# Altium PCB 24VRegulatorKhaled.PcbDoc
Units mil, origin at the board's own origin, x right, y up, seen from the top; angles counter-clockwise.
Board outline 3030 x 3065 mil, 2 copper layers (Top Layer, Bottom Layer); 12 components, 7 nets, 45 pads, 5 vias.
Unrouted connection lines stored in the file: 5.
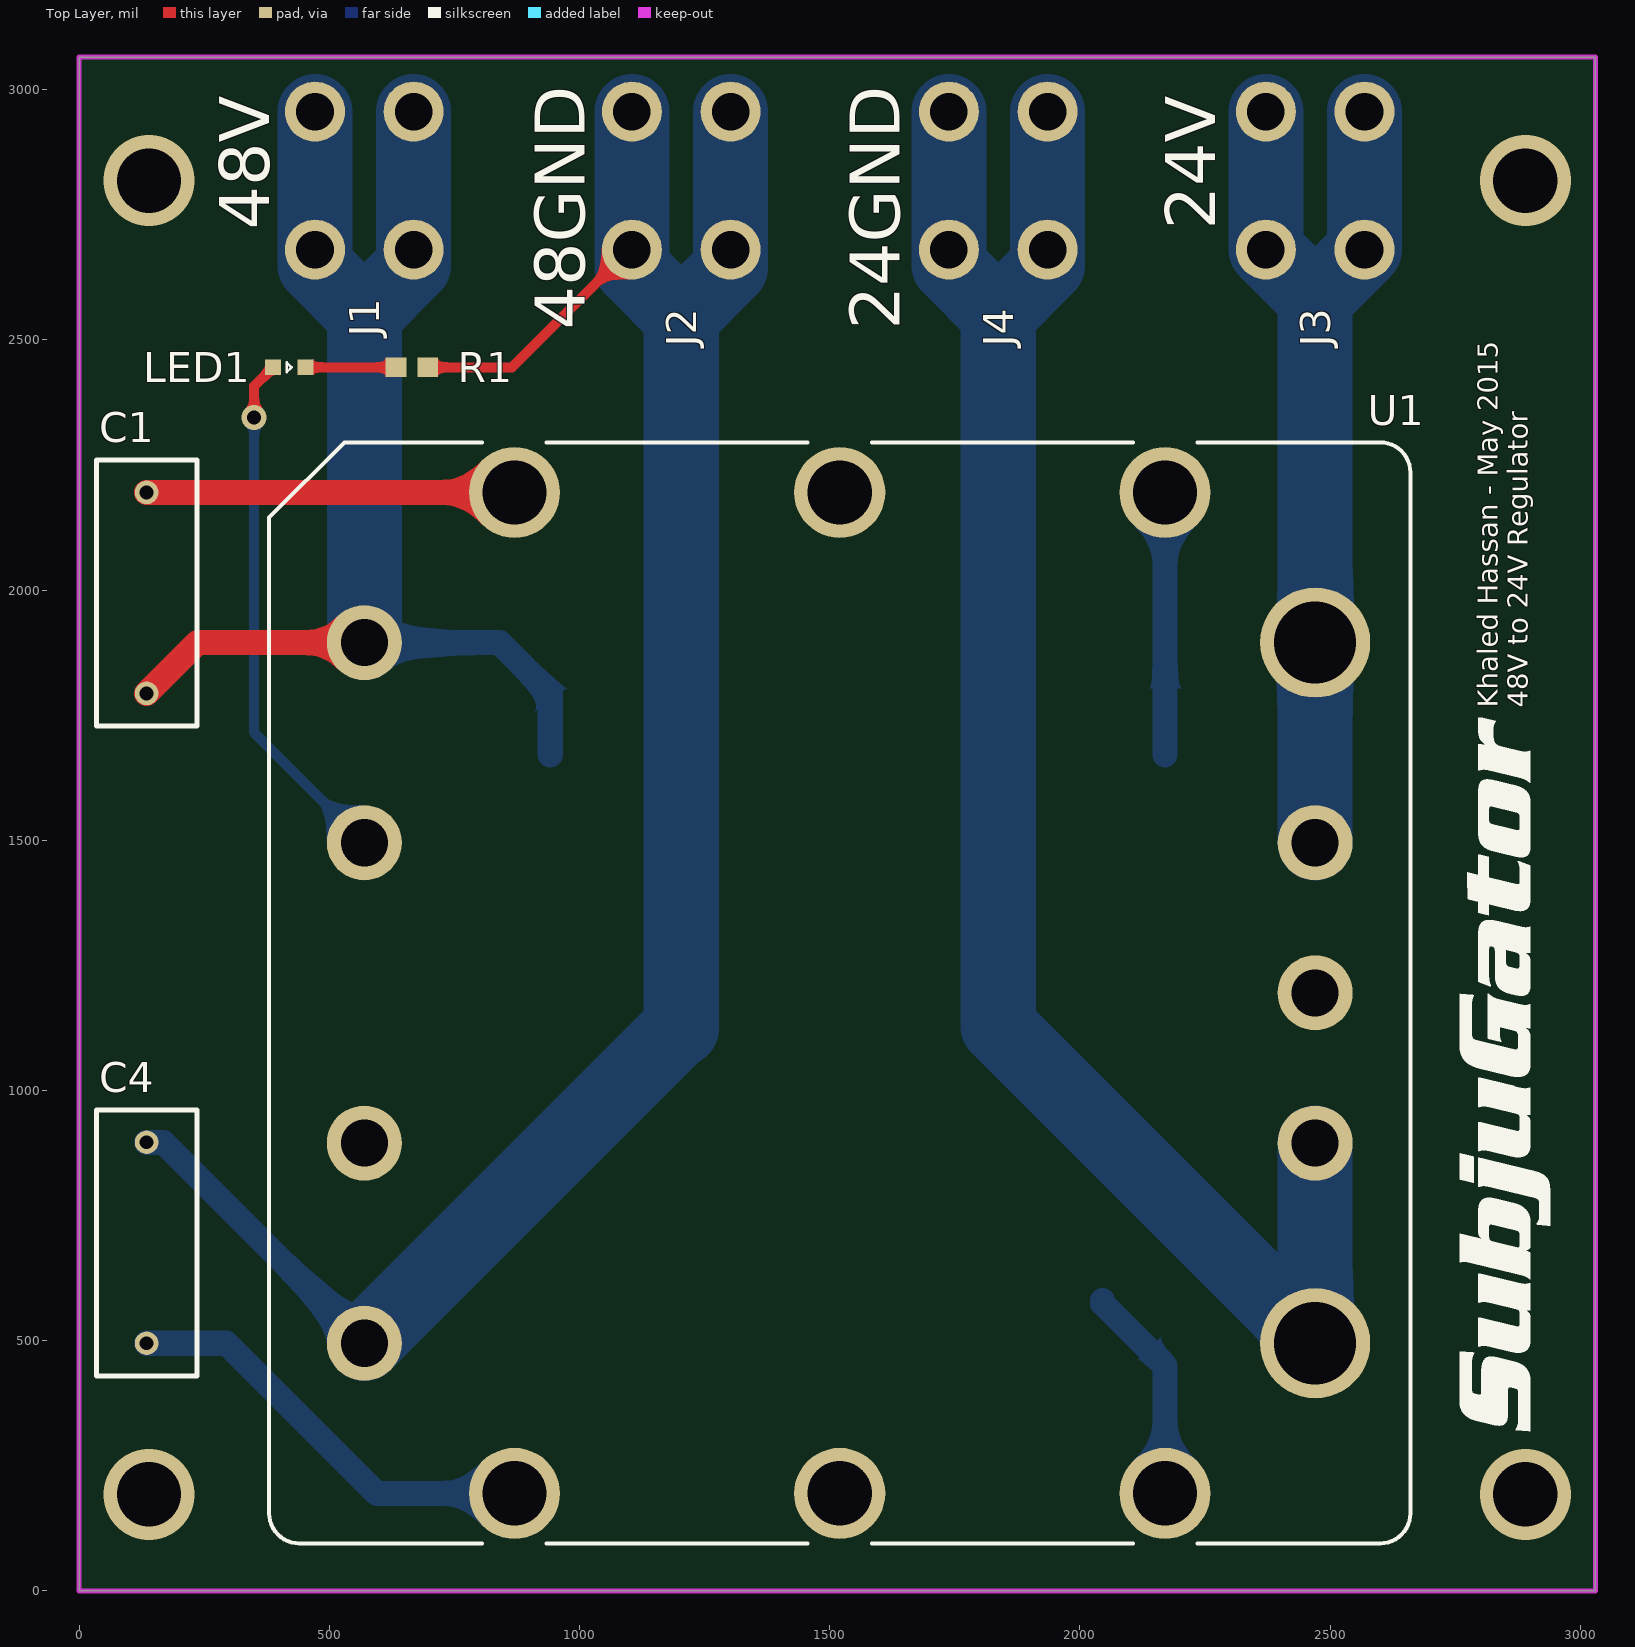
[diagram p0: Top Layer view]
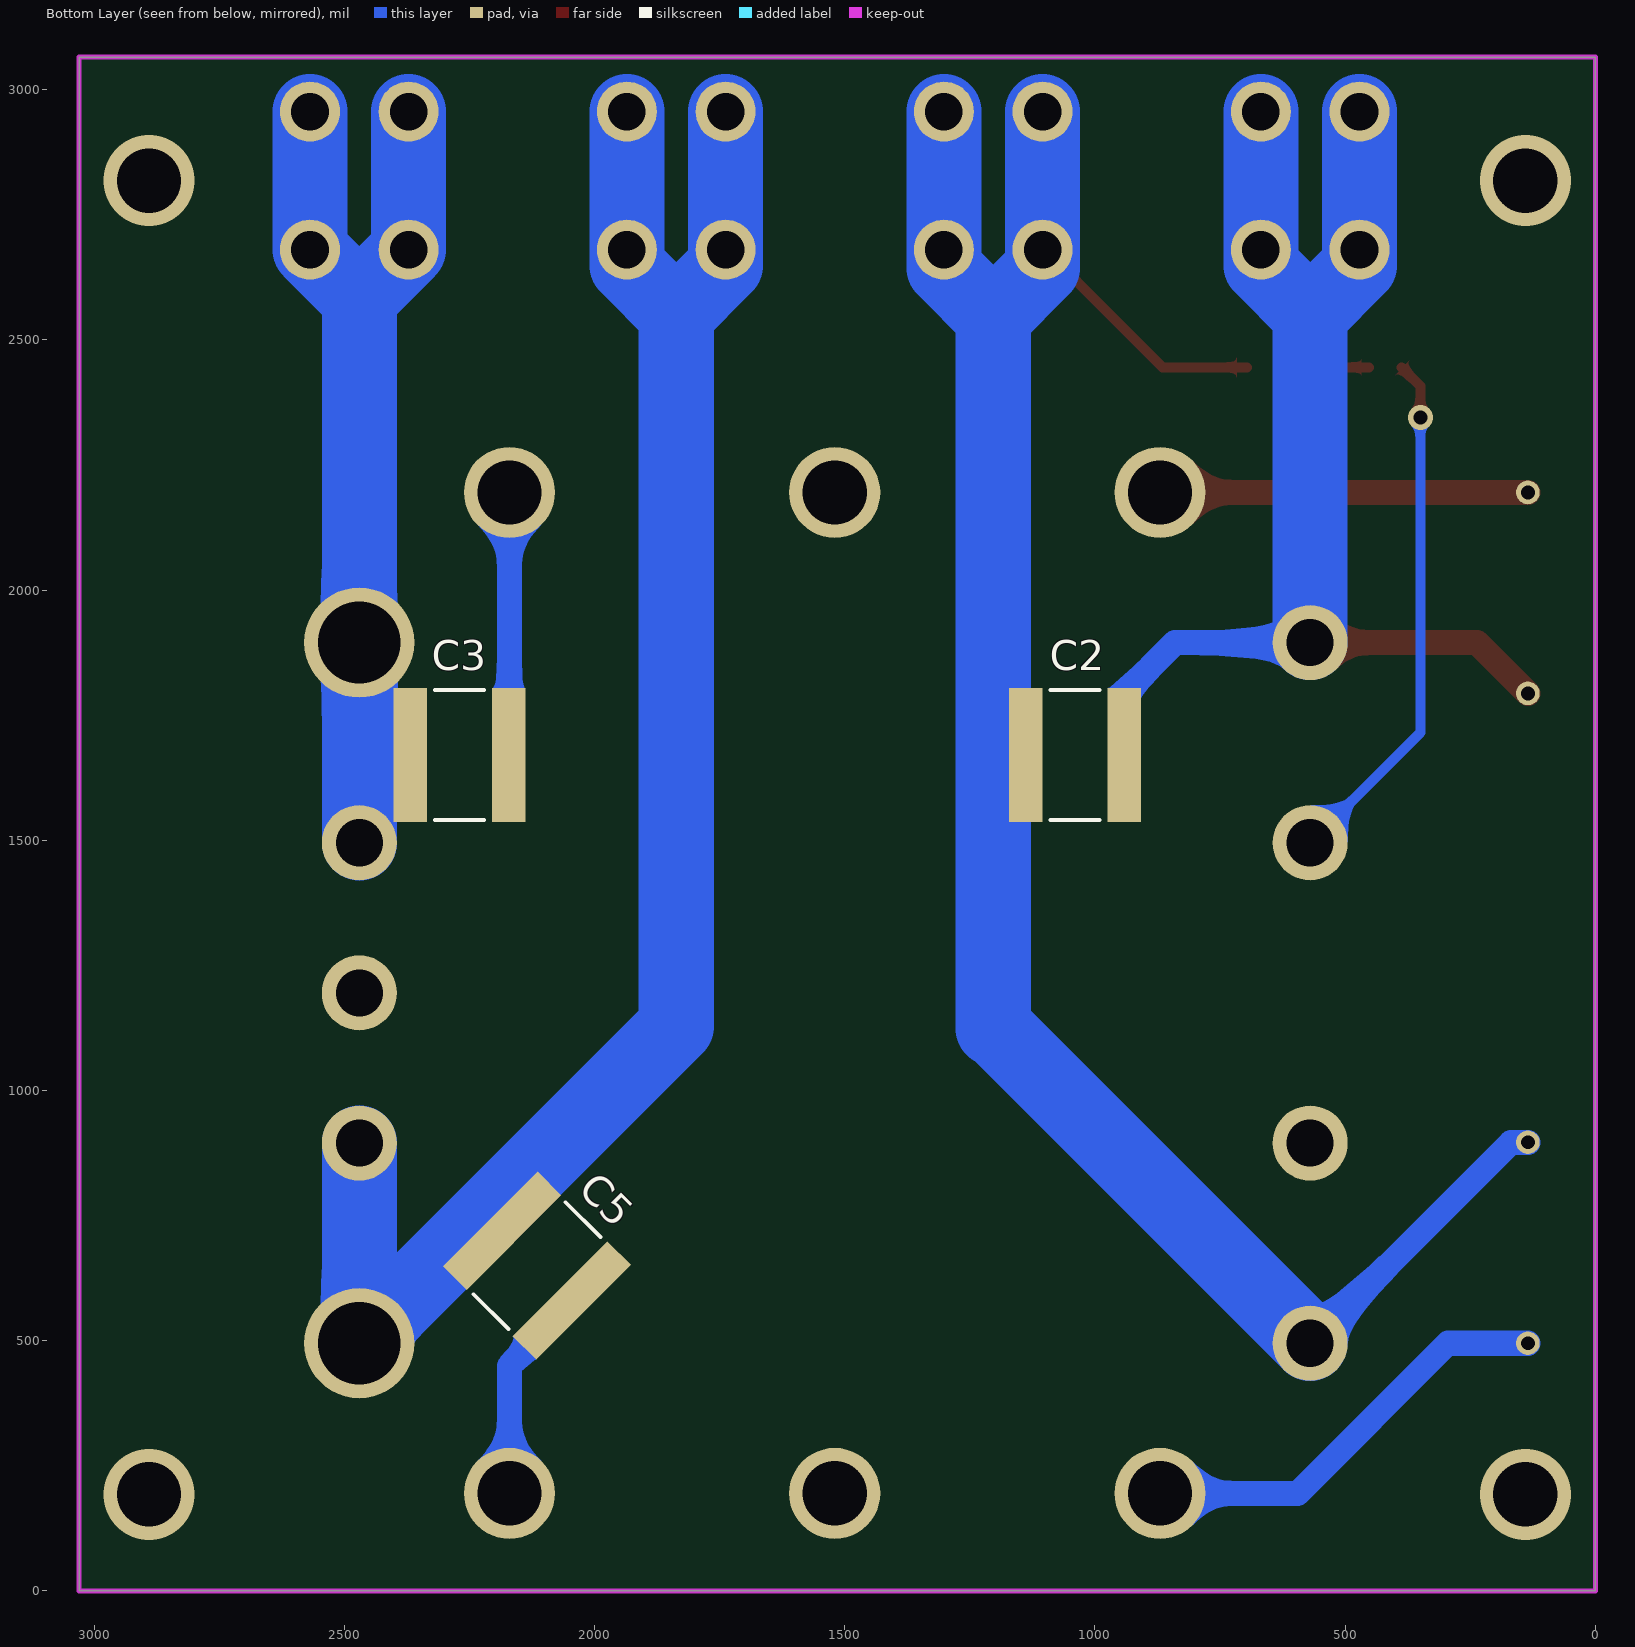
[diagram p1: Bottom Layer view, seen from below]
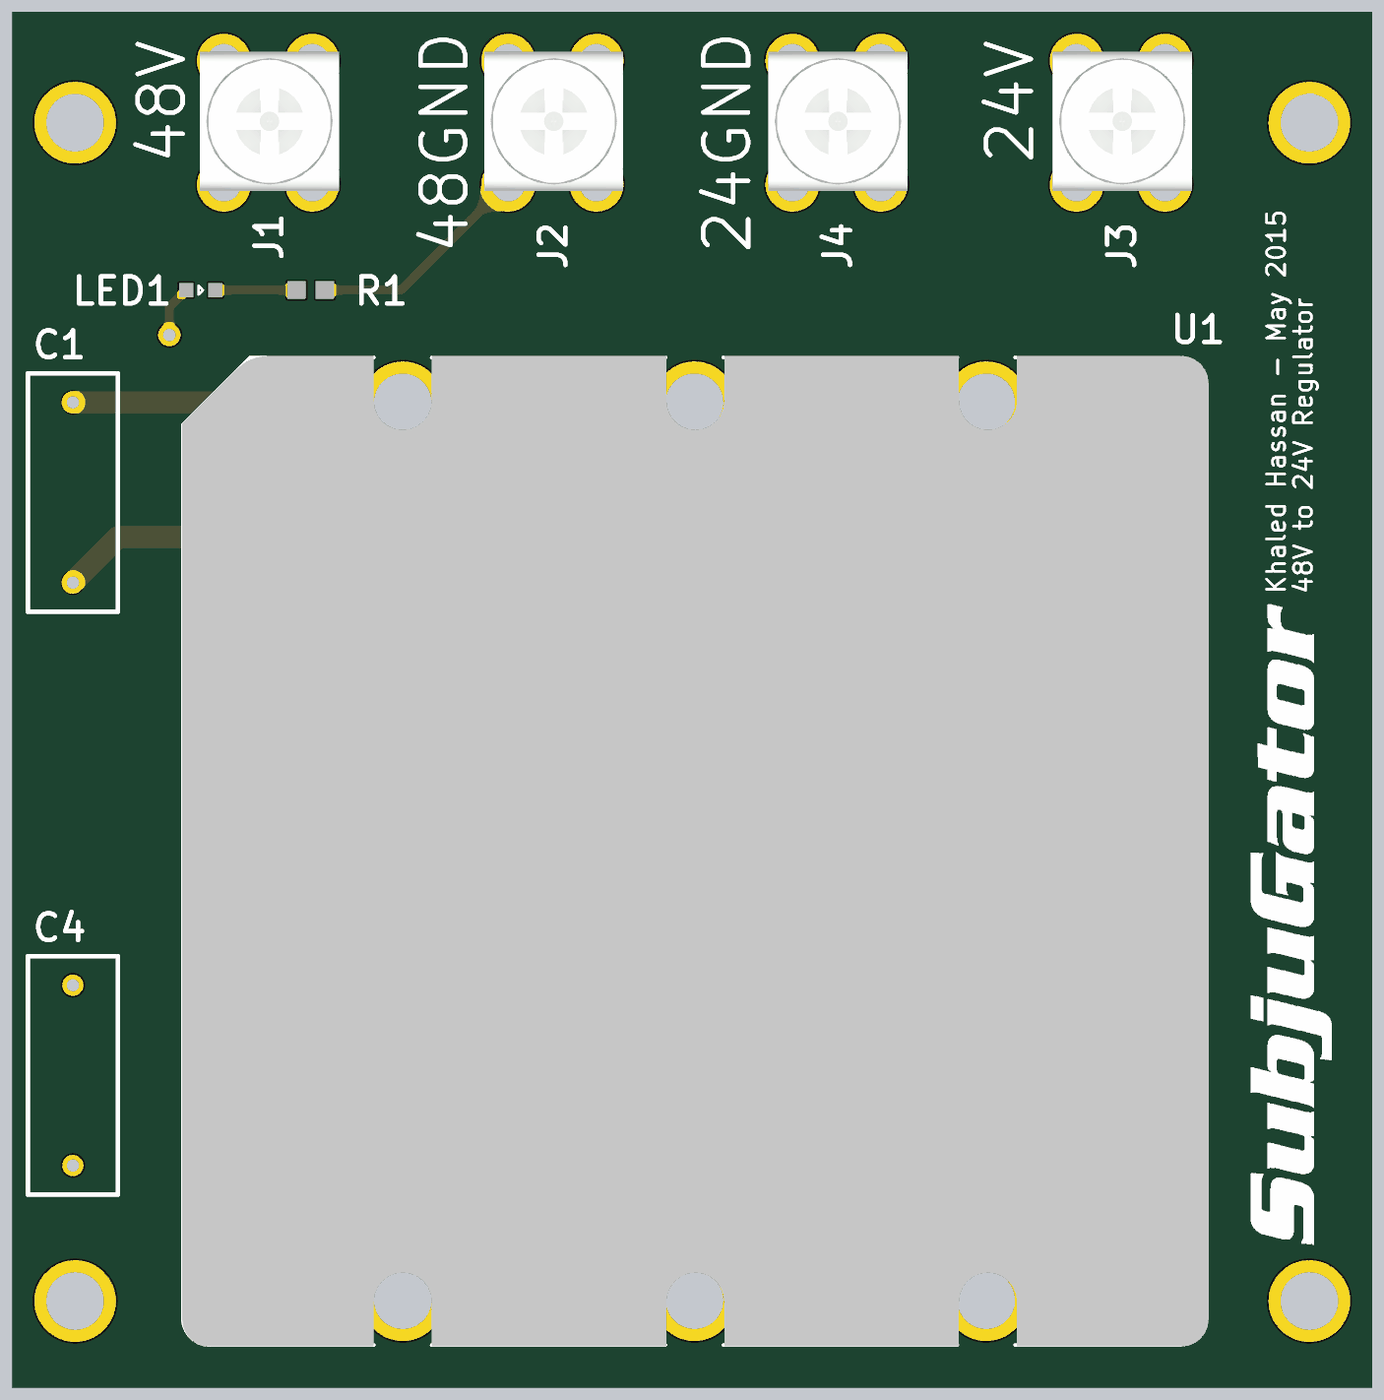
[diagram p2: 3D render of the assembled board from above, using the file's embedded part models]

## Layer stack, top to bottom
Top Solder: solder mask 0.4, Solder Resist, Dk 3.5
Top Layer: signal copper 1.4
Dielectric 1: dielectric 12.6, FR-4, Dk 4.8
Bottom Layer: signal copper 1.4
Bottom Solder: solder mask 0.4, Solder Resist, Dk 3.5

## Board outline
0,0 3030,0 3030,3065 0,3065

## Design rules (kind name [scope] priority, off if disabled: settings)
Clearance [All] p1: gap=10
ComponentClearance [All] p1 off: gap=10 collisioncheckmode=3 verticalgap=10 showdistances=FALSE
PolygonConnect [All] p1: connectstyle=Relief reliefconductorwidth=10 reliefentries=4 polygonreliefangle="90 Angle" airgapwidth=10
RoutingVias [All] p1: holewidth=28 width=50 viastyle="Through Hole" minholewidth=28 minwidth=50 maxholewidth=28 maxwidth=50
SolderMaskExpansion [All] p1: expansion=4
Width [All] p1: maxlimit=1000 minlimit=10 preferedwidth=100 minimp=50.000000 maximp=50.000000 favimp=50.000000
29 further rules are at their usual default settings.

## Components (designator, comment, footprint, x,y, rotation, side; value= is the part's Value field where it differs from the comment)
C1 "Cap" "Kemet PME271Y447MR30" 135,2195 r270 top
C2 "Cap" CAP2225 1040,1670 r0 bottom
C3 "Cap" CAP2225 2270,1670 r180 bottom
C4 "Cap" "Kemet PME271Y447MR30" 135,896.57 r270 top
C5 "Cap" CAP2225 2115,650 r225 bottom
J1 "SCREW TERM VERT PCMNT" "SCREW TERM SINGLE VERT" 471.5,2680 r0 top
J2 "SCREW TERM VERT PCMNT" "SCREW TERM SINGLE VERT" 1104.83,2680 r0 top
J3 "SCREW TERM VERT PCMNT" "SCREW TERM SINGLE VERT" 2371.5,2680 r0 top
J4 "SCREW TERM VERT PCMNT" "SCREW TERM SINGLE VERT" 1738.17,2680 r0 top
LED1 "LED" LED0603 420,2445 r0 top
R1 "Res" RES0603 665,2445 r0 top
U1 "48V->24V" FASTRAK_MINI_ONBOARD_MOUNT 1520,1195 r0 top

## Footprints (in the part's own frame and the unit in brackets; to place one, negate y for a bottom-side part, rotate by r counter-clockwise, add the part's x,y. Pads: shape width x height; smd on the part's side, far side on the other; paste and mask are expansions set on the pad)
CAP2225 [mm] "Chip Capacitor, 2-Leads, Body 5.60x6.40mm, IPC Medium Density"
  rect 1.7x6.8 smd: 1(-2.5,0) 2(2.5,0)
  silkscreen extent -1.25,-3.3 1.25,3.3, body extent -3,-3.4 3,3.4, height 1.8
FASTRAK_MINI_ONBOARD_MOUNT [mil]
  round 182 hole 128.5: 0(-650,-1000) 0(-650,1000) 0(0,-1000) 0(0,1000) 0(650,-1000) 0(650,1000)
  round 150 hole 94: 1(-950,700) 2(-950,300) 3(-950,-300) 4(-950,-700) 6(950,-300) 7(950,0) 8(950,300)
  round 220 hole 164: 5(950,-700) 9(950,700)
  silkscreen extent -1140,-1100 1140,1100, body extent -1141,-1103 1145,1103, height 434
"Kemet PME271Y447MR30" [mm]
  round 1.2 hole 0.7: 1(0,0) 2(10.2,0)
  silkscreen extent -1.65,-2.55 11.85,2.55, body extent -1.65,-2.54 11.85,2.55, height 10.5
LED0603 [mm] "Chip LED, 2-Leads, Body 1.60x0.80mm, IPC Medium Density"
  rect 0.8x0.8 smd: A(-0.825,0) C(0.825,0)
  silkscreen extent -0.13,-0.25 0.12,0.25, body extent -0.88,-0.48 0.87,0.47, height 0.8
RES0603 [mm] "Chip Resistor, 2-Leads, Body 1.60x0.80mm, IPC Medium Density"
  rect 1.05x1 smd: 1(-0.8,0) 2(0.8,0)
  body extent -0.88,-0.48 0.87,0.47, height 0.8
"SCREW TERM SINGLE VERT" [mil] "Keystone Electronics 7701 - TERM W/ASSEMBLD SCREW VERT PCMNT"
  round 120 hole 75: 0(0,0) 0(0,276) 0(197,0) 0(197,276)
  body extent -53,-14 257,296, height 322

## Part data
C1 C4: "Kemet PME271Y447MR30/P271HL472M250A"
J1 J2 J3 J4: "Keystone Electronics 7701"
U1: library part V48B24C250BL, "CONVERTER MOD DC/DC 24V 250W"

## Via types
v1: diameter 182, hole 128.5, Top Layer to Bottom Layer, 4 vias
v2: diameter 50, hole 28, Top Layer to Bottom Layer, 1 vias

## Nets (pads, with @x,y where several pads share a name; then routed paths per layer and width w, separated by ;. In a path a pad name is that pad's centre, name@x,y a point inside that pad or via, vN(x,y) a via of type N, cw(c..) or ccw(c..) an arc to the next point about the centre after c; other vN are vias at no path point)
24GND: C5.1 J4.0 U1.5 U1.6 | length 3610.9
  Bottom Layer w150: J4.0@1738.17,2956 1738.17,2680 1738.17,2648.5 1836.67,2550 ; J4.0@1935.17,2956 1935.17,2680 1935.17,2648.5 1836.67,2550 ; U1.6 U1.5 1836.67,1128.33 1836.67,2550
24V: C3.1 J3.0 U1.8 U1.9 | length 1917.1
  Bottom Layer w150: J3.0@2371.5,2956 2371.5,2680 2470,2581.5 ; U1.8 U1.9 2470,2581.5 ; J3.0@2568.5,2956 2568.5,2680 2470,2581.5
48GND: C2.2 C4.1 J2.0 R1.2 U1.4 | length 4316.1
  Top Layer w20: R1.2 865,2445 J2.0@1100,2680
  Bottom Layer w50: C4.1 168.43,896.57 U1.4
  Bottom Layer w150: U1.4 1198.5,1123.5 ; J2.0@1104.83,2956 1104.83,2680 1104.83,2643.5 1203.33,2545 ; 1203.33,1123.5 1203.33,2545 ; J2.0@1301.83,2956 1301.83,2680 1301.83,2643.5 1203.33,2545
48V: C1.2 C2.1 J1.0 U1.1 | length 2562.7
  Top Layer w50: C1.2 236.57,1895 U1.1
  Bottom Layer w50: U1.1 840,1895 941.57,1793.43 C2.1
  Bottom Layer w150: J1.0@471.5,2956 471.5,2680 471.5,2648.5 570,2550 ; U1.1 570,2550 ; J1.0@668.5,2956 668.5,2680 668.5,2648.5 570,2550
BASEPLATE: C1.1 C3.2 C4.2 C5.2 U1.0 | length 2556.3
  Top Layer w50: C1.1 U1.0@870,2195
  Bottom Layer w50: C4.2 295,495 595,195 U1.0@870,195 ; C5.2 2045.4,574.6 2170,450 U1.0@2170,195 ; C3.2@2170,1670 U1.0@2170,2195
NetLED1_A: LED1.A U1.2 | length 1066.7
  Top Layer w20: v2(350,2345) 350,2407.48 LED1.A
  Bottom Layer w20: v2@350,2355 350,1715 U1.2
NetLED1_C: LED1.C R1.1 | length 181
  Top Layer w20: LED1.C R1.1
pads on no net: U1.3 U1.7
copper on no net:
  other v1: 140,193 2890,193 140,2818 2890,2818

## Keep-outs
Keep-Out Layer:
  the board outline again, w10

## Silkscreen, mask and mechanical layers (free items; w line width, h text height)
Top Overlay:
  drawing of 1730 lines, arcs and shapes, not listed
  text "48V" at 380,2719.94 h100 r90
  text "24V" at 2270,2719.94 h100 r90
  text "48GND" at 1010,2520 h100 r90
  text "24GND" at 1640,2520 h100 r90
  text "Khaled Hassan - May 2015" at 2835,1765 h40 r90
  text "48V to 24V Regulator" at 2895,1765 h40 r90